# EAGLE board prototype.job (EAGLE 6.5.0)
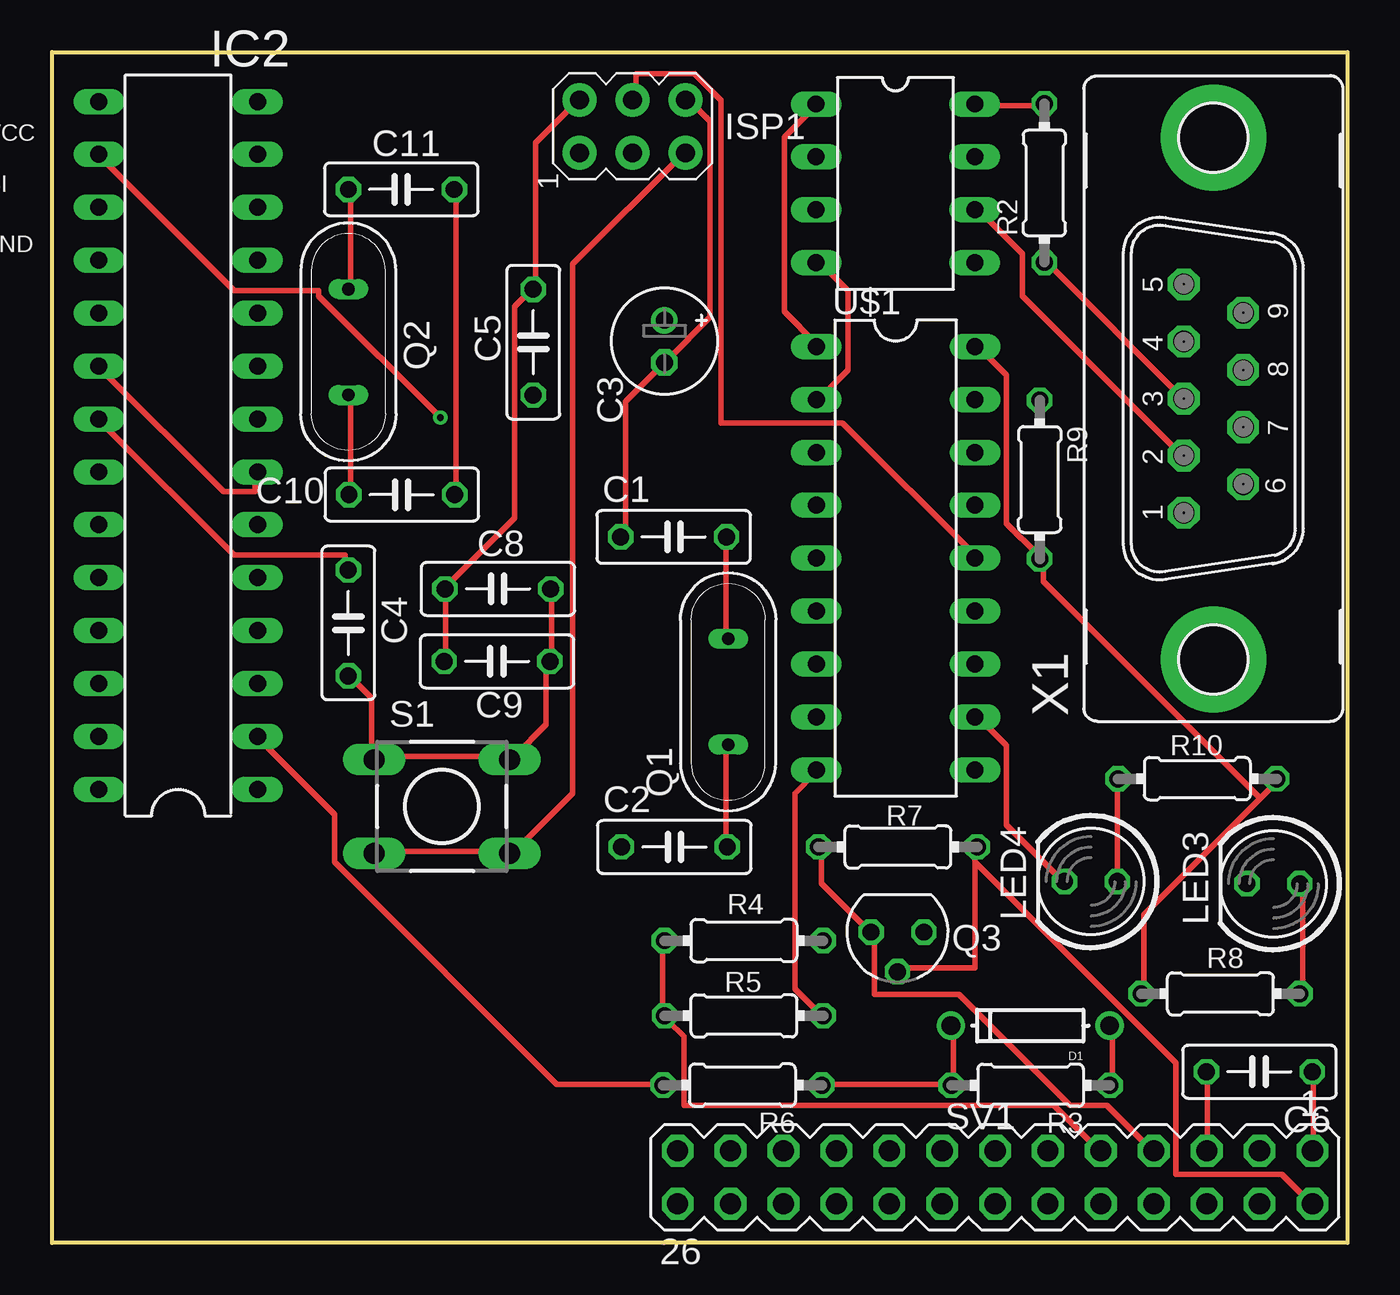
[diagram p0: board, top side]
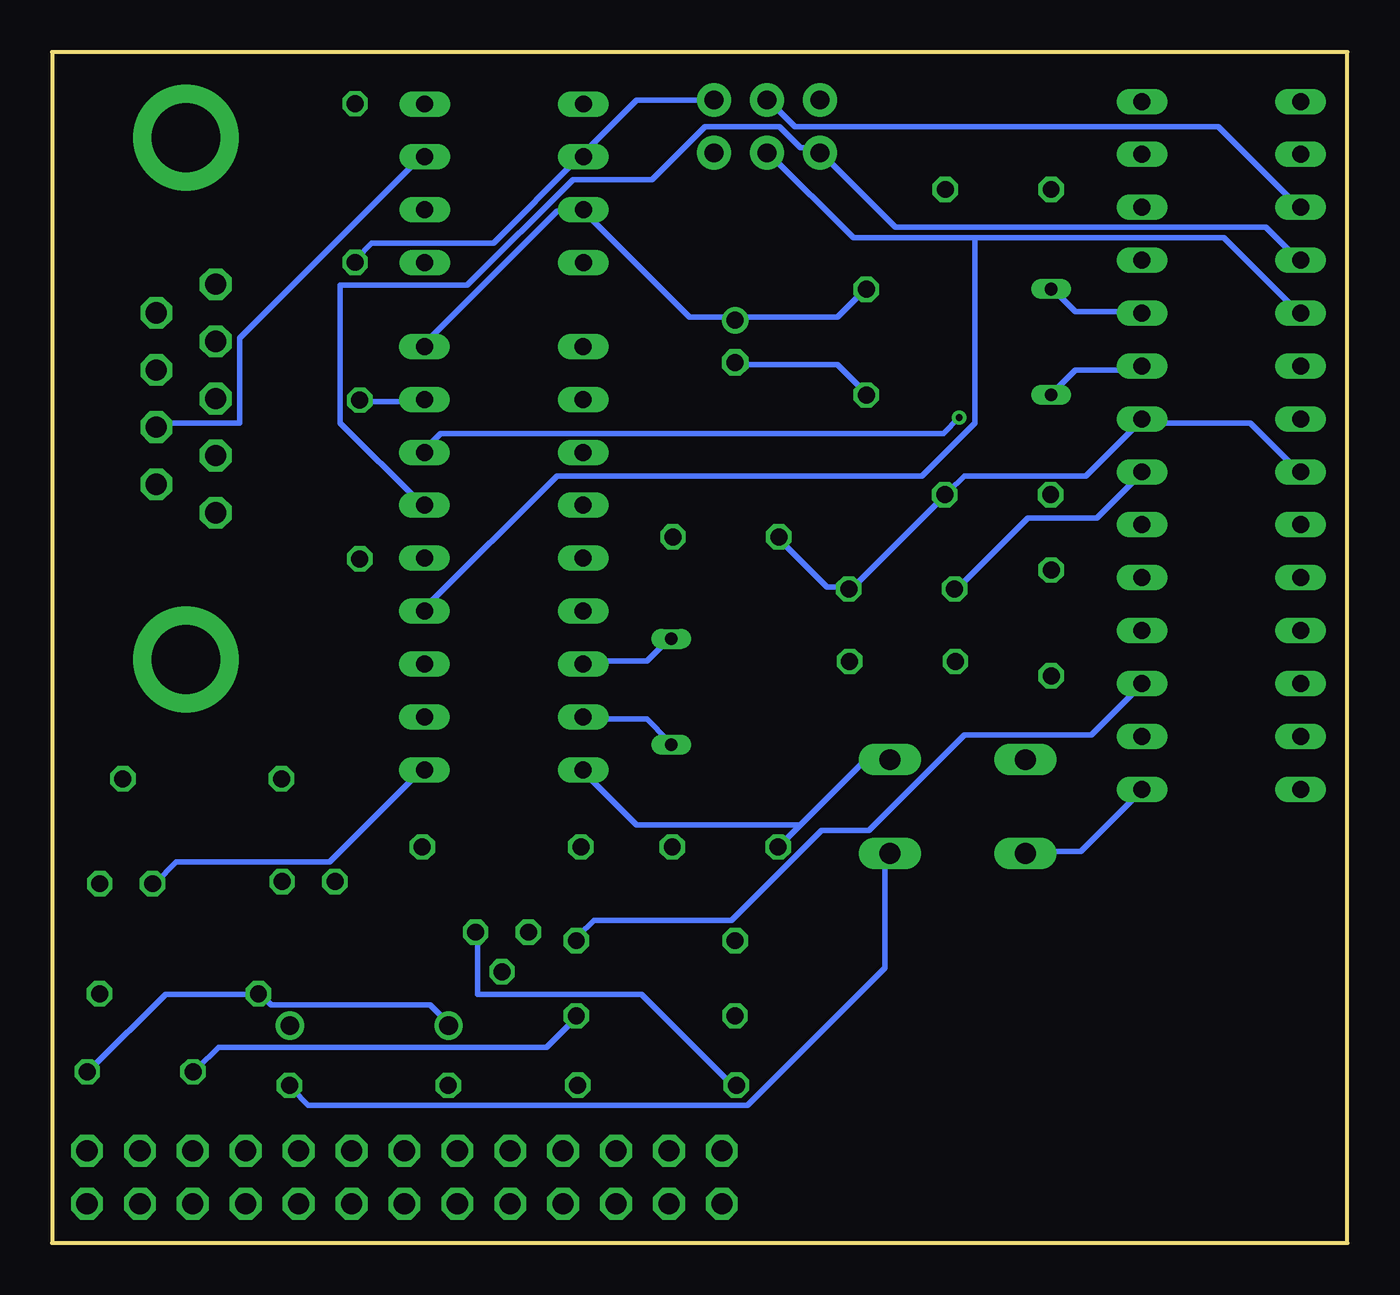
[diagram p1: board, bottom side, seen from below]

Size 62.19 x 57.17 mm. Coordinates in mm from the lower left corner, seen from the top.
Outline: 0,0 0,57.17 62.19,57.17 62.19,0 0,0
Copper layers (1*16): Top 0.0356mm / dielectric 1.5011mm / Bottom 0.0356mm
Design rules "LaenPCBOrder *": minimum track width 10mil, minimum drill 13mil, track to track 6mil, track to pad 6mil, pad to pad 6mil, via to via 6mil, smd to smd 6mil, copper to edge 15mil, drill to drill 6mil, minimum pad ring 7mil, minimum via ring 7mil, stop-mask expansion 3mil, vias tented up to drill 0mil, thermal gap 10mil

## Footprints (pad centres in the part's own frame; a part is rotated, then mirrored left to right if it is on the bottom)
C050-025X075 = drill 0.813 octagon: 1 -2.54,0; 2 2.54,0
E2-5 = drill 0.813 pad 1.27: + -1.016,0 | drill 0.813 pad 1.27 octagon: - 1.016,0
DO-1N4148 = drill 0.9: A -3.81,0; C 3.81,0
DIL08 = drill 0.813 long: 1 -3.81,-3.81; 2 -1.27,-3.81; 3 1.27,-3.81; 4 3.81,-3.81; 5 3.81,3.81; 6 1.27,3.81; 7 -1.27,3.81; 8 -3.81,3.81
DIL28-3 = drill 0.813 long: 1 -16.51,-3.81; 2 -13.97,-3.81; 3 -11.43,-3.81; 4 -8.89,-3.81; 5 -6.35,-3.81; 6 -3.81,-3.81; 7 -1.27,-3.81; 8 1.27,-3.81; 9 3.81,-3.81; 10 6.35,-3.81; 11 8.89,-3.81; 12 11.43,-3.81; 13 13.97,-3.81; 14 16.51,-3.81; 15 16.51,3.81; 16 13.97,3.81; 17 11.43,3.81; 18 8.89,3.81; 19 6.35,3.81; 20 3.81,3.81; 21 1.27,3.81; 22 -1.27,3.81; 23 -3.81,3.81; 24 -6.35,3.81; 25 -8.89,3.81; 26 -11.43,3.81; 27 -13.97,3.81; 28 -16.51,3.81
AVRISP = drill 0.9 pad 1.626: 1 -1.27,2.54; 2 1.27,2.54; 3 -1.27,0; 4 1.27,0; 5 -1.27,-2.54; 6 1.27,-2.54
LED5MM = drill 0.813 octagon: A -1.27,0; K 1.27,0
QS = drill 0.61 long: 1 -2.54,0; 2 2.54,0
SOT54E = drill 0.813 octagon: D -1.27,0; G 0,1.905; S 1.27,0
0204/7 = drill 0.813 octagon: 1 -3.81,0; 2 3.81,0
DTS-6 = drill 1 long: 1 -3.25,2.25; 2 3.25,2.25; 3 -3.25,-2.25; 4 3.25,-2.25
MA13-2 = drill 1.016 octagon: 1 -15.24,-1.27; 2 -15.24,1.27; 3 -12.7,-1.27; 4 -12.7,1.27; 5 -10.16,-1.27; 6 -10.16,1.27; 7 -7.62,-1.27; 8 -7.62,1.27; 9 -5.08,-1.27; 10 -5.08,1.27; 11 -2.54,-1.27; 12 -2.54,1.27; 13 0,-1.27; 14 0,1.27; 15 2.54,-1.27; 16 2.54,1.27; 17 5.08,-1.27; 18 5.08,1.27; 19 7.62,-1.27; 20 7.62,1.27; 21 10.16,-1.27; 22 10.16,1.27; 23 12.7,-1.27; 24 12.7,1.27; 25 15.24,-1.27; 26 15.24,1.27
DIL18 = drill 0.813 long: 1 -10.16,-3.81; 2 -7.62,-3.81; 3 -5.08,-3.81; 4 -2.54,-3.81; 5 0,-3.81; 6 2.54,-3.81; 7 5.08,-3.81; 8 7.62,-3.81; 9 10.16,-3.81; 10 10.16,3.81; 11 7.62,3.81; 12 5.08,3.81; 13 2.54,3.81; 14 0,3.81; 15 -2.54,3.81; 16 -5.08,3.81; 17 -7.62,3.81; 18 -10.16,3.81
M09VP = drill 1.016 octagon: 1 -5.486,1.422; 2 -2.743,1.422; 3 0,1.422; 4 2.743,1.422; 5 5.486,1.422; 6 -4.115,-1.422; 7 -1.372,-1.422; 8 1.372,-1.422; 9 4.115,-1.422 | drill 3.302 pad 5.08: G1 -12.522,0; G2 12.522,0

## Placement (x,y rotation side)
C1  [C050-025X075]  29.84,33.9 0 top
C2  [C050-025X075]  29.87,19.01 0 top
C3  [E2-5]  29.4,43.29 270 top
C4  [C050-025X075]  14.22,29.77 270 top
C5  [C050-025X075]  23.1,43.25 270 top
C6  [C050-025X075]  57.96,8.22 180 top
C8  [C050-025X075]  21.4,31.4 180 top
C9  [C050-025X075]  21.36,27.92 180 top
C10  [C050-025X075]  16.79,35.93 180 top
C11  [C050-025X075]  16.77,50.58 180 top
D1  [DO-1N4148]  46.96,10.43 180 top
IC1  PCA82C251  [DIL08]  40.49,50.87 270 top
IC2  ATMEGA328P-PU  [DIL28-3]  6.06,38.29 90 top
ISP1  AVRISP-6  [AVRISP]  27.87,53.61 90 top
LED3  [LED5MM]  58.63,17.25 180 top
LED4  [LED5MM]  49.87,17.35 180 top
Q1  [QS]  32.46,26.47 90 top
Q2  [QS]  14.22,43.25 270 top
Q3  BS170  [SOT54E]  40.59,14.92 180 top
R2  [0204/7]  47.64,50.89 90 top
R3  [0204/7]  46.98,7.57 180 top
R4  [0204/7]  33.21,14.51 180 top
R5  [0204/7]  33.21,10.9 0 top
R6  [0204/7]  33.15,7.57 180 top
R7  [0204/7]  40.61,19.01 0 top
R8  [0204/7]  56.1,11.96 0 top
R9  [0204/7]  47.42,36.65 270 top
R10  [0204/7]  54.98,22.29 180 top
S1  DTS-6  [DTS-6]  18.72,20.95 0 top
SV1  [MA13-2]  45.28,3.15 180 top
U$1  MCP2515DIL  [DIL18]  40.5,32.88 270 top
X1  [M09VP]  55.76,40.54 90 top

## Library data of the parts
C1-C6 C8-C11 R2-R10 = rcl
D1 IC2 ISP1 = adafruit
IC1 = micro-philips; OC_FARNELL: 3692358; OC_NEWARK: unknown
LED3 LED4 = led
Q1 Q2 = special
Q3 = transistor-small-signal
S1 = switch-tact
SV1 = con-lstb; OC_FARNELL: unknown; OC_NEWARK: unknown
U$1 = MCP2515_MT
X1 = con-subd; OC_FARNELL: unknown; OC_NEWARK: unknown

## Nets
GND: C1.1 C2.1 C3.- C4.2 C5.2 C6.2 C8.1 C9.1 C10.1 C11.1 IC1.2 IC2.8 IC2.22 ISP1.6 R2.1 R5.2 S1.1 S1.2 SV1.5 U$1.9 X1.3
N$1: IC1.1 U$1.1
N$2: IC1.4 U$1.2
N$3: C1.2 Q1.2 U$1.7
N$4: C2.2 Q1.1 U$1.8
N$5: R9.1 U$1.17
N$6: LED3.A R8.2
N$7: LED4.A R10.2
N$8: LED4.K U$1.11
N$9: LED3.K U$1.10
N$10: IC2.16 U$1.16
N$11: IC2.3 R4.1
N$15: IC2.19 ISP1.3 U$1.13
N$16: C10.2 IC2.9 Q2.2
N$17: C11.2 IC2.10 Q2.1
N$18: IC1.8 R2.2
N$19: C4.1 IC2.21
N$22: R4.2 R5.1 SV1.9
N$23: IC2.2 Q3.D R6.2
N$24: D1.A IC2.1 ISP1.5 R3.1 S1.3 S1.4
N$25: Q3.G R7.2 SV1.2
N$26: IC2.18 ISP1.1 U$1.15
N$27: IC2.17 ISP1.4 U$1.14
N$29: IC1.6 X1.2
N$30: IC1.7 X1.7
N$32: Q3.S R7.1 SV1.7
VCC: C3.+ C5.1 C6.1 C8.2 C9.2 D1.C IC1.3 IC2.7 IC2.20 ISP1.2 R3.2 R6.1 R8.1 R9.2 R10.1 SV1.1 U$1.18

## Tracks (layer width: path | path; a pad name or v marks a point on that pad's centre or on a via)
GND
  Top 0.254: C4.2 14.33,27.18 15.34,26.16 15.34,23.37 S1.1 15.6,23.37 21.95,23.37 S1.2 22.2,23.37 23.72,24.89 23.72,27.69 C9.1 23.98,27.94 23.98,31.24 C8.1 | C6.2 55.47,8.13 55.47,4.57 SV1.5 | R5.2 36.93,10.92 35.66,12.19 35.66,21.59 36.68,22.61 U$1.9 | R2.1 47.85,46.99 54.2,40.64 X1.3 | C11.1 19.41,50.55 19.41,36.07 C10.1 | C1.1 27.53,34.04 27.53,40.39 29.31,42.16 C3.- 29.57,42.42 31.6,44.45 31.6,53.85 30.58,54.86 ISP1.6
  Bottom 0.254: 26.26,20.07 23.22,23.11 22.2,23.11 S1.2 | 26.26,20.07 27.28,19.05 C2.1 | 26.26,20.07 34.14,20.07 36.68,22.61 U$1.9 | C6.2 55.22,8.38 54.2,9.4 38.46,9.4 37.19,10.67 R5.2 | ISP1.6 30.58,54.86 34.14,54.86 36.68,52.32 IC1.2 36.93,52.07 41,48.01 46.84,48.01 47.6,47.24 R2.1 | IC2.22 2.39,37.08 4.67,39.37 9.75,39.37 IC2.8 10.01,39.37 12.55,36.83 18.39,36.83 19.15,36.07 C10.1 19.41,35.81 23.72,31.5 C8.1 23.98,31.5 24.99,31.5 27.28,33.78 C1.1 | C5.2 23.22,40.89 24.49,42.16 29.31,42.16 C3.-
N$1
  Top 0.254: U$1.1 36.68,43.18 35.15,44.7 35.15,53.09 36.68,54.61 IC1.1
N$2
  Top 0.254: IC1.4 36.93,46.99 38.2,45.72 38.2,41.91 36.93,40.64 U$1.2
N$3
  Top 0.254: C1.2 32.36,33.78 32.36,29.21 Q1.2
  Bottom 0.254: Q1.2 32.61,28.96 33.63,27.94 36.68,27.94 U$1.7
N$4
  Top 0.254: C2.2 32.36,19.05 32.36,23.88 Q1.1
  Bottom 0.254: Q1.1 32.61,24.13 33.63,25.15 36.68,25.15 U$1.8
N$5
  Bottom 0.254: R9.1 47.35,40.39 44.55,40.39 U$1.17
N$6
  Top 0.254: LED3.A 60.05,17.02 60.05,12.19 R8.2
N$7
  Top 0.254: LED4.A 51.16,17.53 51.16,22.1 R10.2
N$8
  Top 0.254: LED4.K 48.36,17.53 45.82,20.07 45.82,23.88 44.55,25.15 U$1.11
N$9
  Bottom 0.254: U$1.10 44.55,22.61 48.87,18.29 56.24,18.29 57.25,17.27 LED3.K
N$10  (via drill 0.33)
  Top 0.254: v18.64,39.62 12.8,45.47 12.8,45.72 8.74,45.72 2.39,52.07 IC2.16
  Bottom 0.254: v18.64,39.62 19.41,38.86 43.54,38.86 44.3,38.1 U$1.16
N$11
  Bottom 0.254: IC2.3 10.01,26.67 12.29,24.38 18.39,24.38 22.96,19.81 25.25,19.81 29.57,15.49 36.17,15.49 36.93,14.73 R4.1
N$15
  Bottom 0.254: 17.88,48.26 23.72,48.26 27.79,52.32 ISP1.3 | 17.88,48.26 5.94,48.26 2.39,44.7 IC2.19 | 17.88,48.26 17.88,39.37 20.42,36.83 37.95,36.83 44.3,30.48 U$1.13
N$16
  Top 0.254: C10.2 14.33,36.07 14.33,40.64 Q2.2
  Bottom 0.254: Q2.2 14.07,40.89 13.06,41.91 10.01,41.91 IC2.9
N$17
  Top 0.254: C11.2 14.33,50.55 14.33,45.97 Q2.1
  Bottom 0.254: Q2.1 14.07,45.72 13.06,44.7 10.01,44.7 IC2.10
N$18
  Top 0.254: IC1.8 44.55,54.61 47.6,54.61 R2.2
N$19
  Top 0.254: IC2.21 2.39,39.37 8.74,33.02 14.07,33.02 14.07,32.51 C4.1
N$22
  Top 0.254: R4.2 29.31,14.48 29.31,10.92 R5.1 29.57,10.67 30.33,9.91 30.33,6.6 48.11,6.6 50.14,4.57 SV1.9
N$23
  Top 0.254: IC2.2 10.01,24.13 13.56,20.57 13.56,18.29 24.23,7.62 29.31,7.62 R6.2
  Bottom 0.254: Q3.D 41.76,14.73 41.76,11.94 33.88,11.94 29.57,7.62 R6.2
N$24
  Top 0.254: R3.1 50.9,7.62 50.9,10.41 D1.A | S1.3 15.6,18.8 21.95,18.8 S1.4 22.2,18.8 24.99,21.59 24.99,46.99 30.33,52.32 ISP1.5
  Bottom 0.254: IC2.1 10.01,21.59 12.8,18.8 15.34,18.8 S1.3 | R3.1 50.65,7.37 49.89,6.6 28.8,6.6 22.2,13.21 22.2,18.54 S1.4
N$25
  Top 0.254: 44.3,18.29 44.3,18.8 R7.2 | 44.3,18.29 44.3,13.21 40.74,13.21 Q3.G | 44.3,18.29 53.95,8.64 53.95,3.3 59.03,3.3 60.3,2.03 SV1.2
N$26
  Bottom 0.254: IC2.18 2.39,47.24 3.91,48.77 21.69,48.77 25.25,52.32 ISP1.1 25.5,52.58 26.26,52.58 27.28,53.59 30.84,53.59 33.38,51.05 37.19,51.05 42.27,45.97 48.36,45.97 48.36,39.37 44.55,35.56 U$1.15
N$27
  Top 0.254: U$1.14 44.3,33.02 37.95,39.37 32.11,39.37 32.11,54.86 30.84,56.13 28.04,56.13 28.04,55.12 ISP1.4
  Bottom 0.254: IC2.17 2.39,49.78 6.2,53.59 26.52,53.59 27.79,54.86 ISP1.4
N$29
  Top 0.254: IC1.6 44.55,49.53 46.58,47.5 46.58,45.47 54.2,37.85 X1.2
N$30
  Bottom 0.254: IC1.7 44.55,52.07 53.19,43.43 53.19,39.37 57,39.37 X1.7
N$32
  Top 0.254: R7.1 36.93,18.8 36.93,17.27 39.22,14.99 Q3.S 39.47,14.73 39.47,11.94 43.54,11.94 48.87,6.6 50.65,6.6 52.68,4.57 SV1.7
VCC
  Top 0.254: C6.1 60.55,8.13 60.55,4.57 SV1.1 | D1.C 43.28,10.41 43.28,7.62 R3.2 43.03,7.62 37.19,7.62 R6.1 | 58.01,21.34 52.43,15.75 52.43,12.19 R8.1 | 58.01,21.34 58.78,22.1 R10.1 | C9.2 18.9,27.94 18.9,31.24 C8.2 18.9,31.5 22.2,34.8 22.2,44.96 22.96,45.72 C5.1 23.22,45.97 23.22,52.83 25.25,54.86 ISP1.2 25.5,54.86 | IC2.20 2.39,41.91 8.23,36.07 9.75,36.07 9.75,36.83 IC2.7 | U$1.18 44.55,42.93 45.82,41.66 45.82,34.54 47.35,33.02 R9.2 47.6,32.77 47.6,31.75 58.01,21.34
  Bottom 0.254: D1.C 43.28,10.67 44.04,11.43 51.66,11.43 52.17,11.94 R8.1 52.43,11.94 56.74,11.94 60.3,8.38 C6.1 | C8.2 18.64,31.5 15.34,34.8 12.04,34.8 10.01,36.83 IC2.7 | C5.1 23.22,45.72 24.49,44.45 29.31,44.45 C3.+ 29.57,44.45 31.6,44.45 36.68,49.53 IC1.3 36.93,49.53 37.95,49.53 44.3,43.18 U$1.18

## Text on the board
tPlace: SO | VCC | SCK | SI | RST | GND | RXBuf1 | RXBuf0